# EAGLE board estores_18Fv1 (EAGLE 4.16)
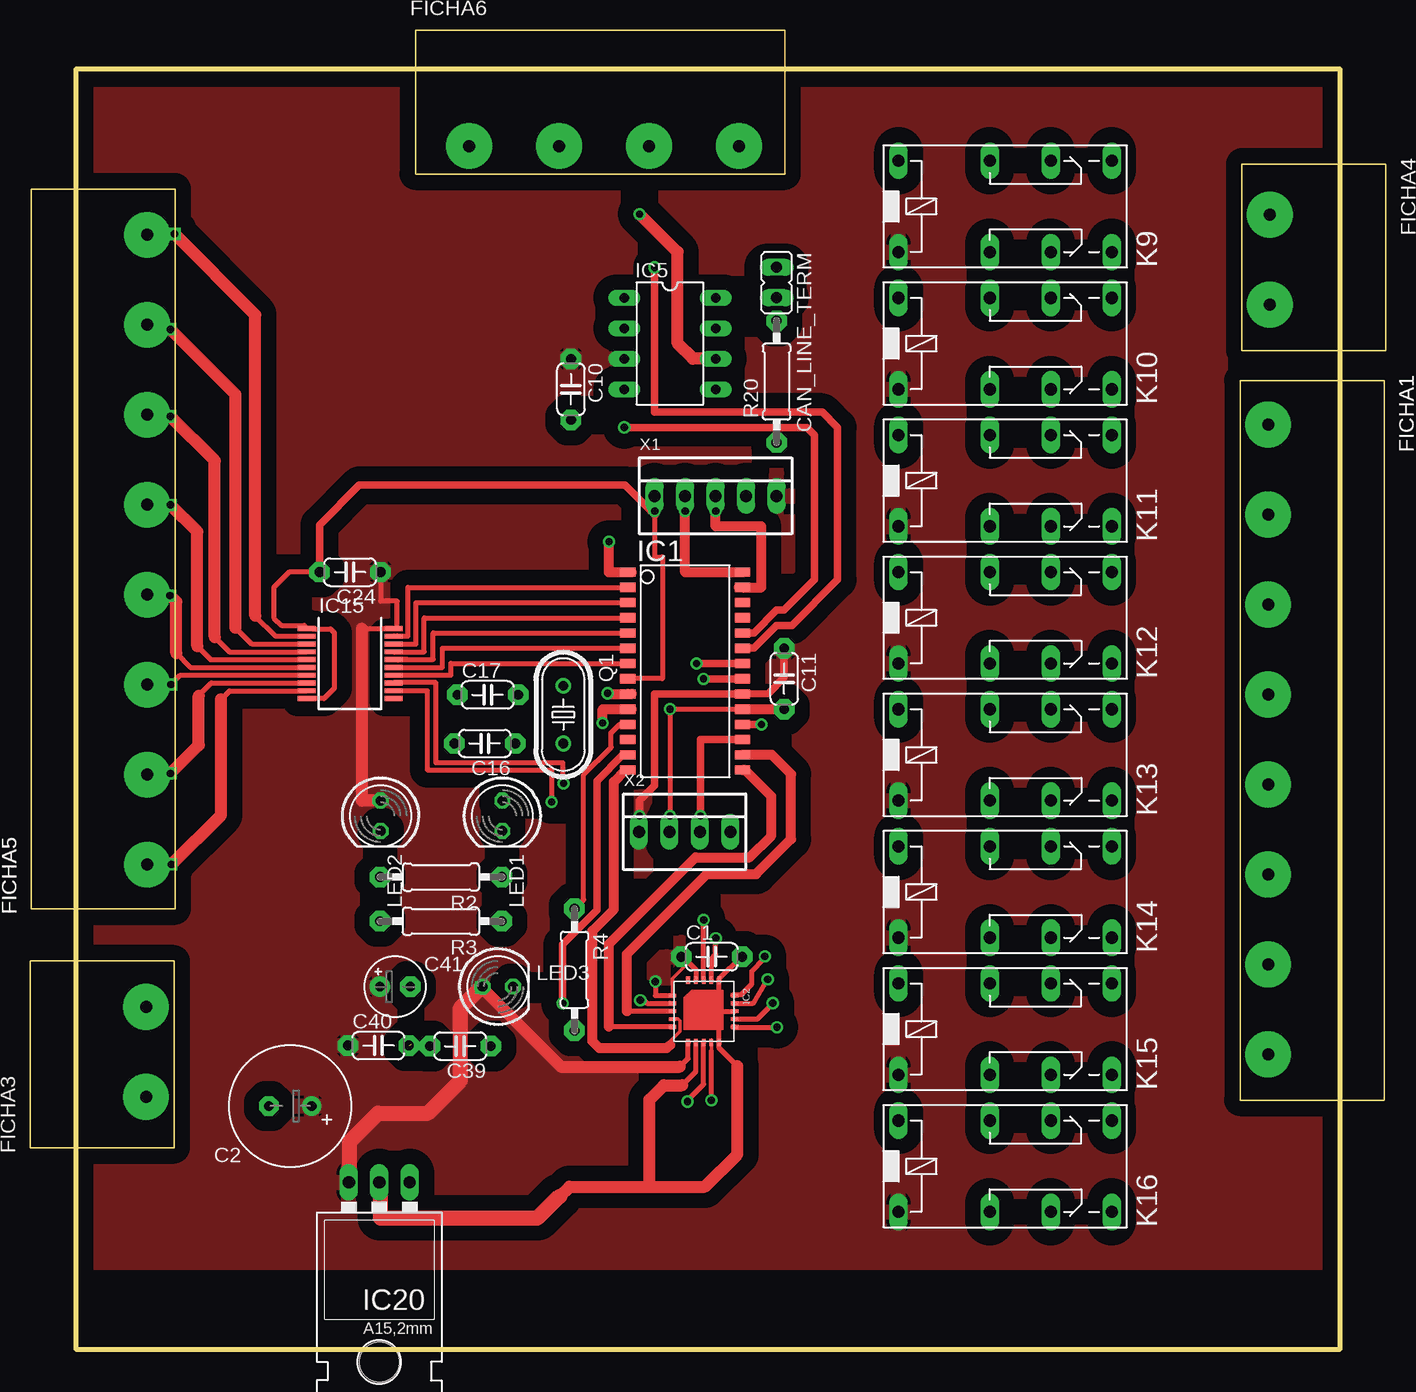
[diagram p0: board, top side]
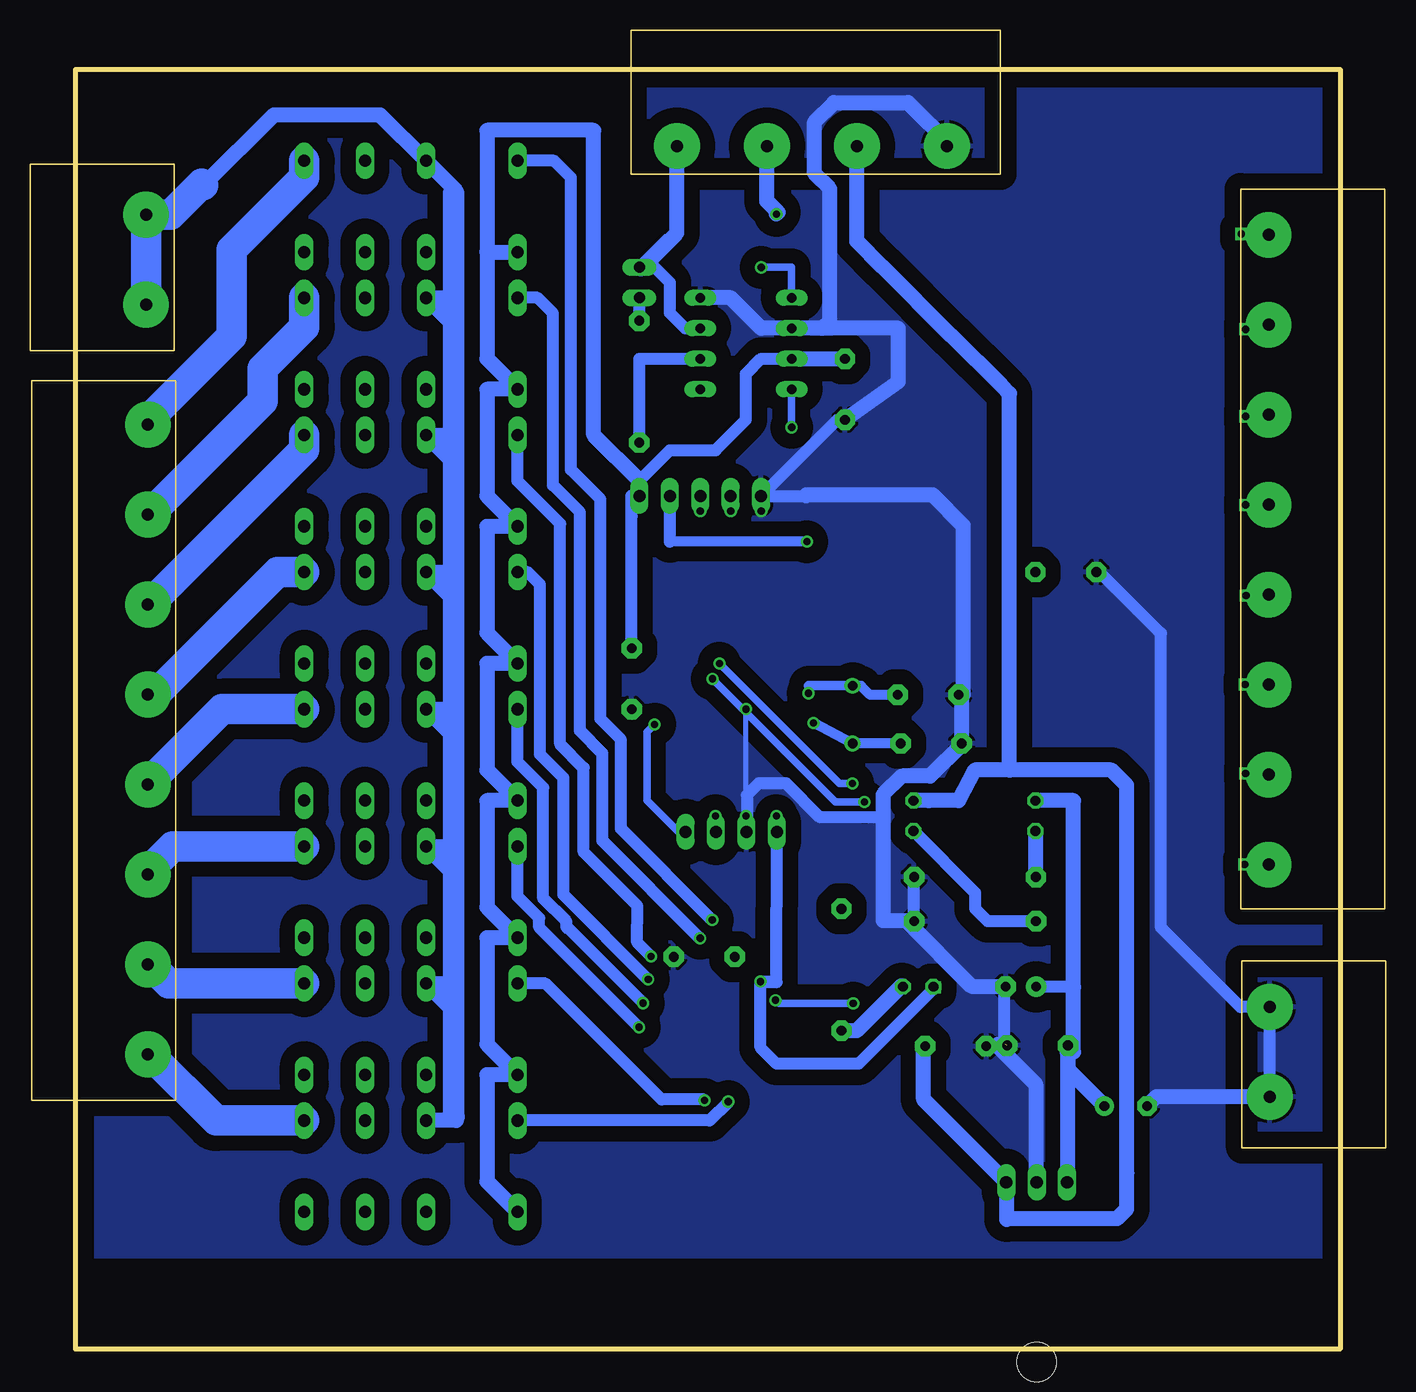
[diagram p1: board, bottom side, seen from below]

Size 105.41 x 106.68 mm. Coordinates in mm from the lower left corner, seen from the top.
Outline: 0,106.68 0,0 105.41,0 105.41,106.68 0,106.68
Copper layers (1*16): Top 0.035mm / dielectric 1.5mm / Bottom 0.035mm
Design rules "default": minimum track width 10mil, minimum drill 24mil, track to track 8mil, track to pad 8mil, pad to pad 8mil, via to via 8mil, smd to smd 8mil, copper to edge 40mil, drill to drill 8mil, minimum pad ring 10mil, minimum via ring 8mil, stop-mask expansion 4mil, vias tented up to drill 0mil, thermal gap 10mil

## Footprints (pad centres in the part's own frame; a part is rotated, then mirrored left to right if it is on the bottom)
C050-024X044 = drill 0.813 pad 1.7 octagon: 1 -2.54,0; 2 2.54,0
E3,5-10 = drill 0.813 pad 1.6 round: + -1.778,0 | drill 0.813 pad 1.6 octagon: - 1.778,0
E2,5-5 = drill 0.813 pad 1.7 round: + -1.27,0 | drill 0.813 pad 1.7 octagon: - 1.27,0
JP1 = drill 0.914 long: 1 0,-1.27; 2 0,1.27
CAMDEN90GRAUS8PINOS = drill 1 pad 3.81 round: PIN0 0,0; PIN1 7.5,0; PIN2 15,0; PIN3 22.5,0; PIN4 30,0; PIN5 37.5,0; PIN6 45,0; PIN7 52.5,0
CAMDEN90GRAUS2PINOS = drill 1 pad 3.81 round: PIN0 3.81,-2.54; PIN1 11.31,-2.54
CAMDEN90GRAUS4PINOS = drill 1 pad 3.81 round: PIN0 3.81,-2.54; PIN1 11.31,-2.54; PIN2 18.81,-2.54; PIN3 26.31,-2.54
SO28W = smd 0.762 x 1.27: 1 -7.62,-4.78; 2 -6.35,-4.78; 3 -5.08,-4.78; 4 -3.81,-4.78; 5 -2.54,-4.78; 6 -1.27,-4.78; 7 0,-4.78; 8 1.27,-4.78; 9 2.54,-4.78; 10 3.81,-4.78; 11 5.08,-4.78; 12 6.35,-4.78; 13 7.62,-4.78; 14 8.89,-4.78; 15 8.89,4.78; 16 7.62,4.78; 17 6.35,4.78; 18 5.08,4.78; 19 3.81,4.78; 20 2.54,4.78; 21 1.27,4.78; 22 0,4.78; 23 -1.27,4.78; 24 -2.54,4.78; 25 -3.81,4.78; 26 -5.08,4.78; 27 -6.35,4.78; 28 -7.62,4.78
TQFN = smd 0.305 x 0.61: PP1 1.3,0; PP2 1.95,0; PP3 2.6,0; PP4 3.25,0; PP5 3.9,0; PP11 3.9,5.2; PP12 3.25,5.2; PP13 2.6,5.2; PP14 1.95,5.2; PP15 1.3,5.2 | smd 0.61 x 0.305: PP6 5.2,1.3; PP7 5.2,1.95; PP8 5.2,2.6; PP9 5.2,3.25; PP10 5.2,3.9; PP16 0,3.9; PP17 0,3.25; PP18 0,2.6; PP19 0,1.95; PP20 0,1.3
DIL08 = drill 0.813 long: 1 -3.81,-3.81; 2 -1.27,-3.81; 3 1.27,-3.81; 4 3.81,-3.81; 5 3.81,3.81; 6 1.27,3.81; 7 -1.27,3.81; 8 -3.81,3.81
SSOP20 = smd 0.4 x 1.5: 1 -2.925,-3.625; 2 -2.275,-3.625; 3 -1.625,-3.625; 4 -0.975,-3.625; 5 -0.325,-3.625; 6 0.325,-3.625; 7 0.975,-3.625; 8 1.625,-3.625; 9 2.275,-3.625; 10 2.925,-3.625; 11 2.925,3.625; 12 2.275,3.625; 13 1.625,3.625; 14 0.975,3.625; 15 0.325,3.625; 16 -0.325,3.625; 17 -0.975,3.625; 18 -1.625,3.625; 19 -2.275,3.625; 20 -2.925,3.625
78XXL = drill 1.016 long: GND 0,-3.81; IN -2.54,-3.81; OUT 2.54,-3.81 | hole 3.302: 0,11.176
351 = drill 1.016 long: 1 -3.81,-3.81; 16 -3.81,3.81; O1 8.89,-3.81; O2 8.89,3.81; P1 3.81,-3.81; P2 3.81,3.81; S1 13.97,-3.81; S2 13.97,3.81
LED5MM = drill 0.813 octagon: A -1.27,0; K 1.27,0
HC49U-V = drill 0.813 round: 1 -2.413,0; 2 2.413,0
0207/10 = drill 0.813 pad 1.7 octagon: 1 -5.08,0; 2 5.08,0
22-23-2051 = drill 1 long: 1 -5.08,0; 2 -2.54,0; 3 0,0; 4 2.54,0; 5 5.08,0
22-23-2041 = drill 1 long: 1 -3.81,0; 2 -1.27,0; 3 1.27,0; 4 3.81,0

## Placement (x,y rotation side)
C1  100n  [C050-024X044]  53.01,32.7 0 top
C2  47u  [E3,5-10]  17.87,20.26 180 top
C10  100n  [C050-024X044]  41.28,80.01 270 top
C11  100n  [C050-024X044]  59.05,55.88 270 top
C16  22pF  [C050-024X044]  34.09,50.48 180 top
C17  22pF  [C050-024X044]  34.34,54.54 0 top
C24  100n  [C050-024X044]  22.86,64.77 180 top
C39  100n  [C050-024X044]  32.05,25.25 180 top
C40  100n  [C050-024X044]  25.23,25.31 0 top
C41  47u  [E2,5-5]  26.61,30.2 0 top
CAN_LINE_TERM  [JP1]  58.42,88.9 180 top
FICHA1  [CAMDEN90GRAUS8PINOS]  99.39,24.56 90 top
FICHA3  CAMDEN90GRAUS2PINOS  [CAMDEN90GRAUS2PINOS]  8.4,32.33 270 top
FICHA4  CAMDEN90GRAUS2PINOS  [CAMDEN90GRAUS2PINOS]  97,83.26 90 top
FICHA5  [CAMDEN90GRAUS8PINOS]  5.96,92.88 270 top
FICHA6  CAMDEN90GRAUS4PINOS  [CAMDEN90GRAUS4PINOS]  59.09,97.75 180 top
IC1  PIC18F2580-E/SO  [SO28W]  50.8,57.15 270 top
IC2  [TQFN]  49.74,30.76 270 top
IC5  MCP2551  [DIL08]  49.53,83.82 270 top
IC15  MAX6818  [SSOP20]  22.86,57.15 270 top
IC20  [78XXL]  25.3,10.1 180 top
K9  351  [351]  72.39,95.25 0 top
K10  351  [351]  72.39,83.82 0 top
K11  351  [351]  72.39,72.39 0 top
K12  351  [351]  72.39,60.96 0 top
K13  351  [351]  72.39,49.53 0 top
K14  351  [351]  72.39,38.1 0 top
K15  351  [351]  72.39,26.67 0 top
K16  351  [351]  72.39,15.24 0 top
LED1  [LED5MM]  35.56,44.45 270 top
LED2  [LED5MM]  25.4,44.45 270 top
LED3  [LED5MM]  35.18,30.22 0 top
Q1  10MHz  [HC49U-V]  40.64,52.88 270 top
R2  560  [0207/10]  30.44,39.35 180 top
R3  560  [0207/10]  30.43,35.66 180 top
R4  560  [0207/10]  41.57,31.62 270 top
R20  100K???  [0207/10]  58.42,80.65 90 top
X1  22-23-2051  [22-23-2051]  53.34,71.12 0 top
X2  22-23-2041  [22-23-2041]  50.76,43.12 0 top

## Library data of the parts
C1 C2 C10 C11 C16 C17 C24 C39-C41 R2-R4 R20 = rcl
CAN_LINE_TERM = jumper
FICHA1 FICHA3-FICHA6 = meus_componentes
IC1 = microchip
IC2 IC15 = maxim
IC5 = micro-philips
IC20 = v-reg
K9-K16 = relay
LED1-LED3 = led
Q1 = crystal
X1 X2 = con-molex

## Nets
+5V: C1.1 C2.+ C10.1 C11.1 C24.1 C40.1 C41.+ IC1.20 IC2.PP1 IC2.PP6 IC2.PP19 IC5.3 IC15.20 IC20.OUT K9.1 K10.1 K11.1 K12.1 K13.1 K14.1 K15.1 K16.1 LED2.A LED3.A X1.5 X2.1
CAN_H: CAN_LINE_TERM.1 FICHA6.PIN0 IC5.7
CAN_L: FICHA6.PIN1 IC5.6 R20.1
CAN_RX(TTL): IC1.24 IC5.4
CAN_TX(TTL): IC1.23 IC5.1
CS: IC1.13 IC2.PP2
DIN: IC1.16 IC2.PP3
DOUT: IC1.15 IC2.PP5
GND: C1.2 C2.- C10.2 C11.2 C16.2 C17.1 C24.2 C39.2 C40.2 C41.- FICHA3.PIN0 FICHA3.PIN1 FICHA6.PIN3 IC1.8 IC1.19 IC2.PP7 IC2.PP10 IC2.PP13 IC2.PP16 IC5.2 IC5.8 IC15.1 IC15.10 IC20.GND R2.1 R3.1 X1.1 X2.2
INPUT1: IC1.2 IC15.19
INPUT2: IC1.3 IC15.18
INPUT3: IC1.4 IC15.17
INPUT4: IC1.5 IC15.16
INPUT5: IC1.6 IC15.15
INPUT6: IC1.7 IC15.14
INPUT7: IC1.22 IC15.13
INPUT8: IC1.21 IC15.12
MCLR: IC1.1 X1.4
N$1: C16.1 IC1.10 Q1.2
N$2: C17.2 IC1.9 Q1.1
N$3: FICHA1.PIN7 K9.S2
N$4: FICHA1.PIN6 K10.S2
N$5: FICHA1.PIN5 K11.S2
N$6: FICHA5.PIN7 IC15.9
N$7: FICHA5.PIN6 IC15.8
N$8: FICHA5.PIN5 IC15.7
N$9: FICHA5.PIN4 IC15.6
N$10: FICHA5.PIN3 IC15.5
N$11: FICHA5.PIN2 IC15.4
N$12: FICHA5.PIN1 IC15.3
N$13: FICHA5.PIN0 IC15.2
N$14: FICHA1.PIN4 K12.S2
N$15: FICHA1.PIN0 K16.S2
N$16: FICHA1.PIN1 K15.S2
N$17: FICHA1.PIN2 K14.S2
N$18: FICHA1.PIN3 K13.S2
N$20: LED3.K R4.2
N$21: IC1.11 R4.1
N$70: FICHA4.PIN0 FICHA4.PIN1 K9.P2 K10.P2 K11.P2 K12.P2 K13.P2 K14.P2 K15.P2 K16.P2
N$112: LED1.K R3.2
N$115: LED2.K R2.2
N$217: CAN_LINE_TERM.2 R20.2
OUT0: IC2.PP18 K9.16
OUT1: IC2.PP17 K10.16
OUT2: IC2.PP15 K11.16
OUT3: IC2.PP14 K12.16
OUT4: IC2.PP12 K13.16
OUT5: IC2.PP11 K14.16
OUT6: IC2.PP9 K15.16
OUT7: IC2.PP8 K16.16
PGC: IC1.27 X1.3
PGD: IC1.28 X1.2
RS232_RX: IC1.18 X2.4
RS232_TX: IC1.17 X2.3
SCLK: IC1.14 IC2.PP4
VCCIN: C39.1 FICHA6.PIN2 IC20.IN LED1.A

## Tracks (layer width: path | path; a pad name or v marks a point on that pad's centre or on a via)
+5V  (via drill 0.6)
  Top 0.305: C1.1 51.1,32.23 51.09,32.24 49.74,30.89 IC2.PP1
  Top 0.406: 51.09,32.22 51.07,32.24 | C1.1 51.09,32.22 | IC2.PP19 51.69,31.62 51.09,32.22 | IC2.PP6 51.04,24.22 50.34,23.53 | IC2.PP1 48.31,29.46 v48.31,30.63 | 25.45,64.77 25.45,64.83 | 25.45,64.77 C24.1 | 25.45,64.77 25.45,62.38 25.42,62.38 25.42,62.34 26.79,62.34 26.79,60.07 IC15.20 26.46,60.07 26.46,60.05 23.85,60.05
  Top 0.61: v46.99,44.45 46.99,45.72 48.26,46.99 48.26,54.61 IC1.20 57.76,54.63 59.05,56 C11.1
  Top 1.016: LED2.A 23.85,45.72 23.85,60.05 | LED3.A 33.91,30.13 33.87,30.09 40.44,23.53 50.34,23.53 | 22.57,13.91 22.48,13.81 | IC20.OUT 22.57,13.91 | 22.57,13.91 22.71,14.05
  Top 1.27: v33.78,30.14 32.08,28.44 32.08,22.37 29.36,19.65 25.2,19.65 22.83,17.28 22.83,13.98 IC20.OUT
  Bottom 0.61: 46.99,44.6 47.04,44.65 | 46.99,44.6 v46.99,44.45 | X2.1 46.95,44.56 46.99,44.6
  Bottom 1.016: C11.1 59.05,69.44 | 59.05,69.44 59.05,70.48 | IC5.3 48.26,82.55 49.53,81.28 49.53,77.47 52.07,74.93 55.88,74.93 58.42,72.39 58.34,72.39 58.34,71.12 X1.5 59.07,71.12 59.07,69.44 59.05,69.44 | X2.1 46.97,30.58 48.33,30.59 47.35,30.64 v48.31,30.63 48.31,25.12 46.97,23.78 40.13,23.78 v33.78,30.14 33.86,30.22 LED3.A | 22.23,30.18 22.31,30.18 22.34,30.2 C41.+ | C40.1 22.41,25.31 22.31,25.2 22.76,24.75
  Bottom 1.27: K16.1 71.12,13.97 71.12,22.86 K15.1 71.12,25.4 71.12,34.29 K14.1 71.12,36.83 71.12,45.72 K13.1 71.12,48.26 71.12,57.15 K12.1 71.12,59.69 71.12,68.58 K11.1 71.12,71.12 71.12,80.01 K10.1 71.12,82.55 71.12,91.44 | 71.12,91.44 K9.1 | 22.23,24.77 22.23,30.18 22.23,45.72 LED2.A | 58.42,72.39 62.23,76.2 62.23,101.6 71.12,101.6 71.12,91.44 | IC5.3 C10.1 | 22.71,13.86 22.71,13.81 | IC20.OUT 22.71,13.86 | 22.76,24.75 22.71,24.7 22.71,13.86 | 22.64,25.26 C40.1 22.7,25.29 22.7,23.31 C2.+
  pour Top (isolate 1.27): 1.22,105.68 1.14,7.24 4.25,7.25 104.13,7.25 104.41,105.68 0.8,105.68
CAN_H
  Bottom 1.016: 56.08,92.51 CAN_LINE_TERM.1 57.15,90.17 55.88,88.9 55.88,86.36 54.61,85.09 IC5.7
  Bottom 1.27: CAN_LINE_TERM.1 58.42,90.15 58.29,90.02 55.28,93.04 FICHA6.PIN0
CAN_L  (via drill 0.6)
  Top 1.016: IC5.6 51.44,82.55 50.17,83.82 50.17,91.44 v46.99,94.62
  Bottom 1.016: R20.1 58.42,82.55 IC5.6
  Bottom 1.27: v46.99,94.62 46.99,94.64 46.86,94.77 47.78,95.69 FICHA6.PIN1
CAN_RX(TTL)  (via drill 0.6)
  Top 0.61: IC1.24 56.52,59.69 58.42,61.59 59.05,61.59 61.59,64.14 61.59,76.2 60.96,76.84 v45.72,76.84
  Bottom 0.61: v45.72,76.84 IC5.4
CAN_TX(TTL)  (via drill 0.6)
  Top 0.61: IC1.23 56.52,58.42 58.42,60.32 59.69,60.32 63.5,64.14 63.5,76.84 62.23,78.11 48.26,78.11 v48.26,90.17
  Bottom 0.61: v48.26,90.17 45.72,90.17 IC5.1
CS  (via drill 0.6)
  Top 0.406: v47.06,29.08 47.38,29.08 47.64,28.82 49.5,28.82 49.51,28.81 IC2.PP2
  Top 0.61: IC1.13 45.59,49.53 43.43,47.37 43.43,36.59 40.56,33.72 40.56,28.84 v40.59,28.81
  Bottom 0.61: v40.59,28.81 46.8,28.81 v47.06,29.08
DIN
  Top 0.406: IC2.PP3 49.77,28.16 49.78,28.17 45.97,28.17
  Top 0.813: IC1.16 58.02,49.53 59.62,47.93 59.62,42.51 56.7,39.6 52.61,39.6 45.95,32.94 45.95,28.19 45.97,28.17
DOUT
  Top 0.305: IC1.15 55.25,48.26
  Top 0.406: IC2.PP5 49.69,26.86 49.65,26.82 49.59,26.88 44.45,26.88
  Top 0.813: IC1.15 55.79,48.26 57.97,46.07 57.97,42.78 56.18,40.99 51.67,40.99 44.45,33.76 44.45,26.88
GND  (via drill 0.6)  (1 unrouted)
  Top 0.406: C24.2 17.78,64.77 16.51,63.5 16.51,60.96 17.14,60.32 19.05,60.32 19.23,60.14 IC15.1 19.62,60.07 19.64,60.1 19.71,60.03 21.24,60.03 21.55,59.72 21.55,55.08 20.7,54.23 IC15.10 | v49.53,44.45 v49.53,53.34 IC1.19 | IC1.8 48.89,55.88 48.89,66.04 48.26,66.04 v48.26,69.85 | IC2.PP16 | 53.64,28.16 IC2.PP13 | 53.64,28.16 IC2.PP16 | 53.63,25.56 53.63,25.48 | 53.63,25.56 IC2.PP10 | 53.64,28.16 53.63,28.16 53.63,25.56 | C1.2 55.45,32.7 53.64,30.89 IC2.PP16 | 53.63,25.56 53.63,25.1 55.14,23.58 | IC2.PP7 51.69,23.14 50.54,22
  Top 0.61: C24.2 20.32,68.71 23.63,72.02 45.8,72.02 48.26,69.56 | 48.26,69.56 48.29,69.53 | 48.26,69.56 v48.26,69.85
  Top 0.813: IC1.19 C11.2
  Top 1.016: 55.14,23.58 55.14,16.24 52.42,13.52 47.83,13.52 | 47.83,13.52 41.15,13.52 40.34,12.71 40.28,12.66 | 50.54,22 49.03,22 47.83,20.79 47.83,13.52
  Top 1.27: IC20.GND 25.37,13.83 25.37,10.92 38.49,10.92 40.28,12.71 40.34,12.71
  Bottom 0.406: v49.53,53.34 49.53,43.77 49.45,43.69
  Bottom 0.61: 49.49,44.53 49.53,44.49 v49.53,44.45 | 49.49,44.53 X2.2 | 49.49,44.53 49.47,44.56
  Bottom 0.813: v48.26,69.85 48.26,69.82 | v48.26,69.85 | X1.1 v48.26,69.85
  Bottom 1.016: 48.19,71.12 X1.1 41.91,77.47 C10.2 | 48.19,71.12 44.52,71.12 44.45,71.12 | 48.19,71.12 48.19,71.08 | 5.77,28.52 5.64,28.64 | 5.77,28.52 FICHA3.PIN0 8.31,28.52 14.94,35.14 14.94,59.65 20.06,64.77 C24.2 | FICHA3.PIN1 5.85,28.43 5.77,28.52 | 49.45,43.69 49.45,46.17 48.48,47.15 46.16,47.15 43.35,44.34 38.1,44.34 | 35.51,35.57 35.49,35.55 | 35.51,35.57 R3.1 38.09,35.66 38.15,35.73 38.1,35.73 | R2.1 35.52,35.58 35.51,35.57 | 28.03,30.04 28.03,25.72 27.63,25.32 27.64,25.31 C40.2 28.49,25.31 29.72,25.31 29.77,25.26 29.75,25.25 C39.2
  Bottom 1.27: 27.94,25.4 27.94,25.08 27.95,25.08 | 43.18,85.09 42.55,85.73 42.55,96.72 43.81,97.98 43.81,102.3 42.2,103.91 36.02,103.91 32.46,100.36 32.53,100.29 FICHA6.PIN3 | 43.18,85.09 IC5.2 48.26,85.09 50.8,87.63 IC5.8 | C10.2 36.83,80.65 36.83,85.09 43.18,85.09 | 31.46,50.48 31.42,50.52 | 31.46,50.48 C16.2 31.55,54.46 31.67,54.24 31.84,54.61 C17.1 31.43,54.54 31.43,68.67 33.98,71.21 44.52,71.21 44.52,71.12 | 31.46,50.48 34.18,47.76 36.55,47.76 38.1,46.21 38.1,44.34 38.1,35.73 36.21,35.73 30.73,30.24 28.23,30.24 28.03,30.04 C41.- | IC20.GND 25.37,13.98 25.37,22.08 28.49,25.2 28.49,25.31 28.49,25.43 | FICHA3.PIN1 5.87,21.03 15.32,21.03 C2.-
  pour Bottom (isolate 1.27): 1.27,104.14 1.13,7.73 104,7.73 104.14,104.14 104.14,105.41 1.27,105.41
INPUT1
  Top 0.406: 26.53,59.47 IC15.19 26.82,59.42 26.82,59.44 | IC1.2 27.69,63.5 27.69,59.44 26.82,59.44 | 26.82,59.44 26.82,59.46
INPUT2
  Top 0.406: IC1.3 28.36,62.23 28.36,58.77 26.74,58.77 | 26.74,58.77 IC15.18 | 26.74,58.77 26.74,58.74
INPUT3
  Top 0.406: IC1.4 29.05,60.96 29.05,58.13 26.63,58.13 26.63,58.12 IC15.17
INPUT4
  Top 0.406: IC15.16 26.34,57.48 26.32,57.5 | 26.53,57.5 27.6,57.5 27.6,57.47 27.58,57.5 26.37,57.5 26.37,57.48 | 26.37,57.48 26.37,57.47 | IC15.16 26.37,57.48 | IC1.5 29.8,59.69 29.8,57.49 26.85,57.49 26.85,57.48 | 26.85,57.48 26.85,57.43 | IC15.16 26.85,57.48
INPUT5
  Top 0.406: 26.67,56.82 26.64,56.8 26.62,56.82 IC15.15 26.88,56.82 | IC1.6 30.56,58.42 30.56,56.82 26.88,56.82 | 26.88,56.82 26.88,56.84
INPUT6
  Top 0.406: IC1.7 31.28,57.15 31.28,56.18 26.74,56.18 26.74,56.17 IC15.14
INPUT7  (via drill 0.6)
  Top 0.406: IC15.13 26.51,55.55 30.02,55.55 30.02,48.88 40.58,48.88 40.58,47.14 v40.65,47.14
  Top 0.61: IC1.22 55.42,57.15 v51.75,57.15
  Bottom 0.61: v40.65,47.14 41.74,47.14 v51.75,57.15
INPUT8  (via drill 0.6)
  Top 0.406: IC15.12 29.32,54.88 29.32,48.28 39.65,48.28 v39.65,45.61
  Top 0.61: IC1.21 55.52,55.88 55.51,55.87 v52.33,55.87
  Bottom 0.61: v39.65,45.61 42.07,45.61 v52.33,55.87
MCLR  (via drill 0.6)
  Top 0.813: v44.45,67.31 44.45,64.77 IC1.1 46.36,64.77
  Bottom 0.813: v44.45,67.31 55.88,67.31
  Bottom 1.016: 55.88,67.31 55.86,67.31 55.86,71.12 X1.4
N$1  (via drill 0.6)
  Top 0.813: v43.92,52.19 43.92,53.34 IC1.10 46.36,53.34
  Bottom 0.813: C16.1 Q1.2 43.86,52.2 v43.92,52.19
N$2  (via drill 0.6)
  Top 0.813: v44.32,54.67 44.45,54.61 IC1.9 46.36,54.61
  Bottom 0.813: v44.32,54.67 44.28,55.28 Q1.1 40.68,55.3 | 40.68,55.3 40.69,55.31 | C17.2 39.19,54.54 39.93,55.28 40.67,55.28 40.68,55.3
N$3
  Bottom 2.54: K9.S2 86.36,97.69 92.4,91.65 92.4,84.45 99.39,77.46 FICHA1.PIN7
N$4
  Bottom 2.54: K10.S2 86.36,85.19 89.8,81.75 89.8,79.04 99.29,69.56 FICHA1.PIN6
N$5
  Bottom 2.54: 99.39,61.95 99.4,61.95 | FICHA1.PIN5 99.39,61.95 | K11.S2 86.36,74.99 99.39,61.95
N$6  (via drill 0.6)
  Top 0.406: IC15.9 12.82,54.88 12.1,54.16
  Top 1.016: 12.1,54.16 12.1,44.52 v7.97,40.39
  Bottom 1.016: FICHA5.PIN7 5.92,40.35 | FICHA5.PIN7 | v7.97,40.39 FICHA5.PIN7
N$7  (via drill 0.6)
  Top 0.406: IC15.8 11.31,55.52 10.26,54.48
  Top 1.016: 10.26,54.48 10.26,50.34 v7.89,47.97
  Bottom 1.016: FICHA5.PIN6 5.88,47.81 | FICHA5.PIN6 | v7.89,47.97 6.04,47.97 FICHA5.PIN6
N$8  (via drill 0.6)
  Top 0.406: IC15.7 8.7,56.17 v7.93,55.4
  Bottom 0.406: FICHA5.PIN5 6.11,55.38 6.12,55.4 v7.93,55.4
N$9  (via drill 0.6)
  Top 0.406: IC15.6 9.55,56.82 8.37,58.01
  Top 1.016: 8.37,58.01 8.37,62.3 v7.85,62.82
  Bottom 1.016: FICHA5.PIN4 6,62.82 v7.85,62.82
N$10  (via drill 0.6)
  Top 0.406: IC15.5 11.24,57.48 10.13,58.59
  Top 1.016: 10.13,58.59 10.13,68.13 v7.89,70.37
  Bottom 1.016: 5.96,70.37 5.92,70.33 | 5.96,70.37 FICHA5.PIN3 | v7.89,70.37 FICHA5.PIN3 5.96,70.37
N$11  (via drill 0.6)
  Top 0.406: IC15.4 12.81,58.12 11.58,59.35
  Top 1.016: 11.58,59.35 11.58,74.05 v7.88,77.75
  Bottom 1.016: FICHA5.PIN2 5.96,78.07 5.98,78.1 6.33,77.75 v7.88,77.75
N$12  (via drill 0.6)
  Top 0.406: IC15.3 14.67,58.77 13.32,60.12
  Top 1.016: 13.32,60.12 13.32,79.57 v7.88,85.01
  Bottom 1.016: FICHA5.PIN1 5.67,85.38 5.64,85.36 5.98,85.01 v7.88,85.01
N$13  (via drill 0.6)
  Top 0.406: IC15.2 16.67,59.42 14.97,61.13
  Top 1.016: 14.97,61.13 14.97,86.22 v8.23,92.96
  Bottom 1.016: FICHA5.PIN0 5.96,92.65 5.98,92.62 6.33,92.96 v8.23,92.96
N$14
  Bottom 2.54: FICHA1.PIN4 99.39,54.54 99.1,54.25 88.58,64.77 K12.S2
N$15
  Bottom 2.54: FICHA1.PIN0 99.3,24.64 93.71,19.05 K16.S2
N$16
  Bottom 2.54: FICHA1.PIN1 99.3,32.14 97.64,30.48 K15.S2
N$17
  Bottom 2.54: FICHA1.PIN2 99.39,39.64 99.5,39.74 97.33,41.91 K14.S2
N$18
  Bottom 2.54: 99.49,47.06 99.5,47.05 | 99.49,47.06 FICHA1.PIN3 | K13.S2 93.2,53.34 99.49,47.06
N$20
  Bottom 1.27: LED3.K 36.45,30.24 36.53,30.31 40.31,26.54 R4.2
N$21
  Top 0.406: IC1.11 45.33,52.07 44.62,51.36 44.62,50.16 42.33,47.88 42.33,37.45 41.55,36.64
  Top 1.27: 41.56,36.63 41.56,36.59 | 41.56,36.63 41.55,36.64 | R4.1 41.56,36.68 41.56,36.63
N$22
  Bottom 1.778: 73.91,96.35 73.91,19.41 73.87,19.36
N$70
  Bottom 1.27: 95.05,96.73 94.76,97.01 88.9,102.87 80.01,102.87 K9.P2 73.66,96.52 73.66,87.63 K10.P2 73.66,85.09 73.66,76.2 K11.P2 73.66,73.66 73.66,64.77 K12.P2 73.66,62.23 73.66,53.34 K13.P2 73.66,50.8 73.66,41.91 K14.P2 73.66,39.37 73.66,30.48 K15.P2 73.66,27.94 73.66,19.05 K16.P2
  Bottom 2.54: FICHA4.PIN0 99.54,87.29 99.6,87.35 99.54,87.41 FICHA4.PIN1 97.49,94.57 94.9,97.15 94.76,97.01
N$112
  Bottom 1.016: LED1.K 35.55,43.18 30.41,38.04 30.41,36.71 29.36,35.67 25.26,35.67 25.26,35.66 | 25.14,35.55 25.26,35.66 | 25.26,35.66 R3.2
  Bottom 1.27: LED1.K
N$115
  Bottom 1.27: 25.35,39.38 25.35,39.34 | R2.2 25.35,39.38 | LED2.K 25.35,43.18 25.35,39.38
N$217
  Bottom 1.016: R20.2 CAN_LINE_TERM.2
OUT0  (via drill 0.6)
  Top 0.406: IC2.PP18 52.34,30.68 v52.34,35.77
  Bottom 1.016: K9.16 65.53,99.06 64.12,97.65 64.12,73.3 61.67,70.85 61.67,52.53 59.95,50.8 59.95,43.38 v52.34,35.77
OUT1  (via drill 0.6)
  Top 0.406: v53.34,34.25 53.34,32.88 52.98,32.52 52.98,30.68 52.99,30.68 IC2.PP17
  Bottom 1.016: K10.16 66.91,87.63 65.62,86.34 65.62,72.02 63.38,69.77 63.38,51.55 61.49,49.66 61.49,42.39 v53.34,34.25
OUT2  (via drill 0.6)
  Top 0.406: IC2.PP15 54.8,29.46 54.75,29.51 54.79,29.55 55.49,29.55 56.37,30.43 56.37,31.49 57.43,32.55 v57.44,32.73
  Bottom 1.016: K11.16 68.58,72.36 65.02,68.81 65.02,50.42 63.06,48.46 63.06,41.43 58.58,36.93 58.59,33.91 v57.44,32.73
OUT3  (via drill 0.6)
  Top 0.406: v57.68,30.82 56.52,28.91 56.43,28.82 54.79,28.82 54.79,28.81 IC2.PP14
  Bottom 1.016: K12.16 67.73,64.77 66.71,63.75 66.71,49.58 64.74,47.61 64.74,37.88 v57.68,30.82
OUT4  (via drill 0.6)
  Top 0.406: v58.1,28.84 58.1,28.81 56.81,27.52 54.91,27.52 | 54.91,27.52 54.92,27.51 IC2.PP12 | 54.91,27.52 54.89,27.54
  Bottom 1.016: K13.16 68.58,48.95 66.43,46.8 66.43,37.55 64.51,35.63 64.51,35.2 64.41,35.1 64.36,35.1 v58.1,28.84
OUT5  (via drill 0.6)
  Top 0.406: IC2.PP11 54.78,26.86 54.77,26.85 54.79,26.83 v58.44,26.83
  Bottom 1.016: K14.16 68.58,37.74 66.77,35.92 66.77,35.16 v58.44,26.83
OUT6  (via drill 0.6)
  Top 0.305: IC2.PP9 52.99,25.75 52.98,25.76 52.98,24.83
  Top 0.406: v52.98,20.74 52.98,24.83
  Bottom 1.016: K15.16 66.25,30.48 56.56,20.79 53.03,20.79 v52.98,20.74
OUT7  (via drill 0.6)
  Top 0.406: v51.01,20.63 51.01,20.75 52.34,22.09 52.34,25.61 | 52.34,25.61 52.33,25.62 | 52.34,25.61 IC2.PP8
  Bottom 1.016: K16.16 52.58,19.05 v51.01,20.63
PGC  (via drill 0.6)
  Top 0.813: v53.34,69.85 53.34,68.58 57.15,68.58 57.15,63.5 IC1.27 55.25,63.5
  Bottom 0.813: 53.3,69.85 53.3,69.82 | v53.34,69.85 53.3,69.85 | X1.3 53.3,71.12 53.3,69.85
PGD  (via drill 0.6)
  Top 0.813: v50.8,69.85 50.8,64.77 IC1.28
  Bottom 0.813: 50.75,69.85 50.75,69.78 | v50.8,69.85 50.75,69.85 | X1.2 50.75,71.12 50.75,69.85
RS232_RX  (via drill 0.6)
  Top 0.61: 55.25,52.07 IC1.18 v57.15,52.07
  Bottom 0.61: v57.15,52.07 57.78,51.44 57.78,45.72 55.25,43.18 55.11,43.18 55.1,43.18 55.04,43.12 X2.4
RS232_TX  (via drill 0.6)
  Top 0.61: IC1.17 52.07,50.8 v52.07,44.45
  Bottom 0.61: v52.07,44.46 52.17,44.56 | v52.07,44.46 v52.07,44.45 | X2.3 52.03,44.42 v52.07,44.46
SCLK
  Top 0.305: 49.54,25.35 49.54,25.64 50.36,26.46 50.36,27.34 50.18,27.51 IC2.PP4
  Top 0.813: IC1.14 45.82,48.26 44.85,47.29 44.85,36.65 43.06,34.86 43.06,25.66 43.64,25.09 49.28,25.09 49.54,25.35
VCCIN
  Bottom 1.27: 38.13,90.2 32.39,84.46 32.36,84.46 28.2,80.3 | 38.13,90.2 38.3,90.38 | 27.57,48.26 19.05,48.26 17.78,46.99 17.78,14.74 | 27.57,48.26 30.48,48.26 31.81,45.71 34.29,45.72 LED1.A | 17.78,14.74 17.78,14.62 | 38.13,90.2 38.13,90.19 40.28,92.34 FICHA6.PIN2 | 38.13,90.2 | 28.2,80.3 | 28.2,80.3 27.57,79.66 27.57,48.26 | C39.1 34.6,25.26 34.74,25.26 34.74,20.8 IC20.IN 27.8,13.87 27.8,10.81 27.74,10.86 18.61,10.86 17.8,11.67 17.8,14.74 17.78,14.74